# Altium PCB BSR049A.PcbDoc (part 2 of 3)
Units mil, origin at the board's own origin, x right, y up, seen from the top; angles counter-clockwise.
Board outline 3160 x 2500 mil, 4 copper layers (Top Layer1, Layer2, Layer3, Bottom Layer4), stack 61.2 mil thick; 91 components, 27 nets, 205 pads, 285 vias.
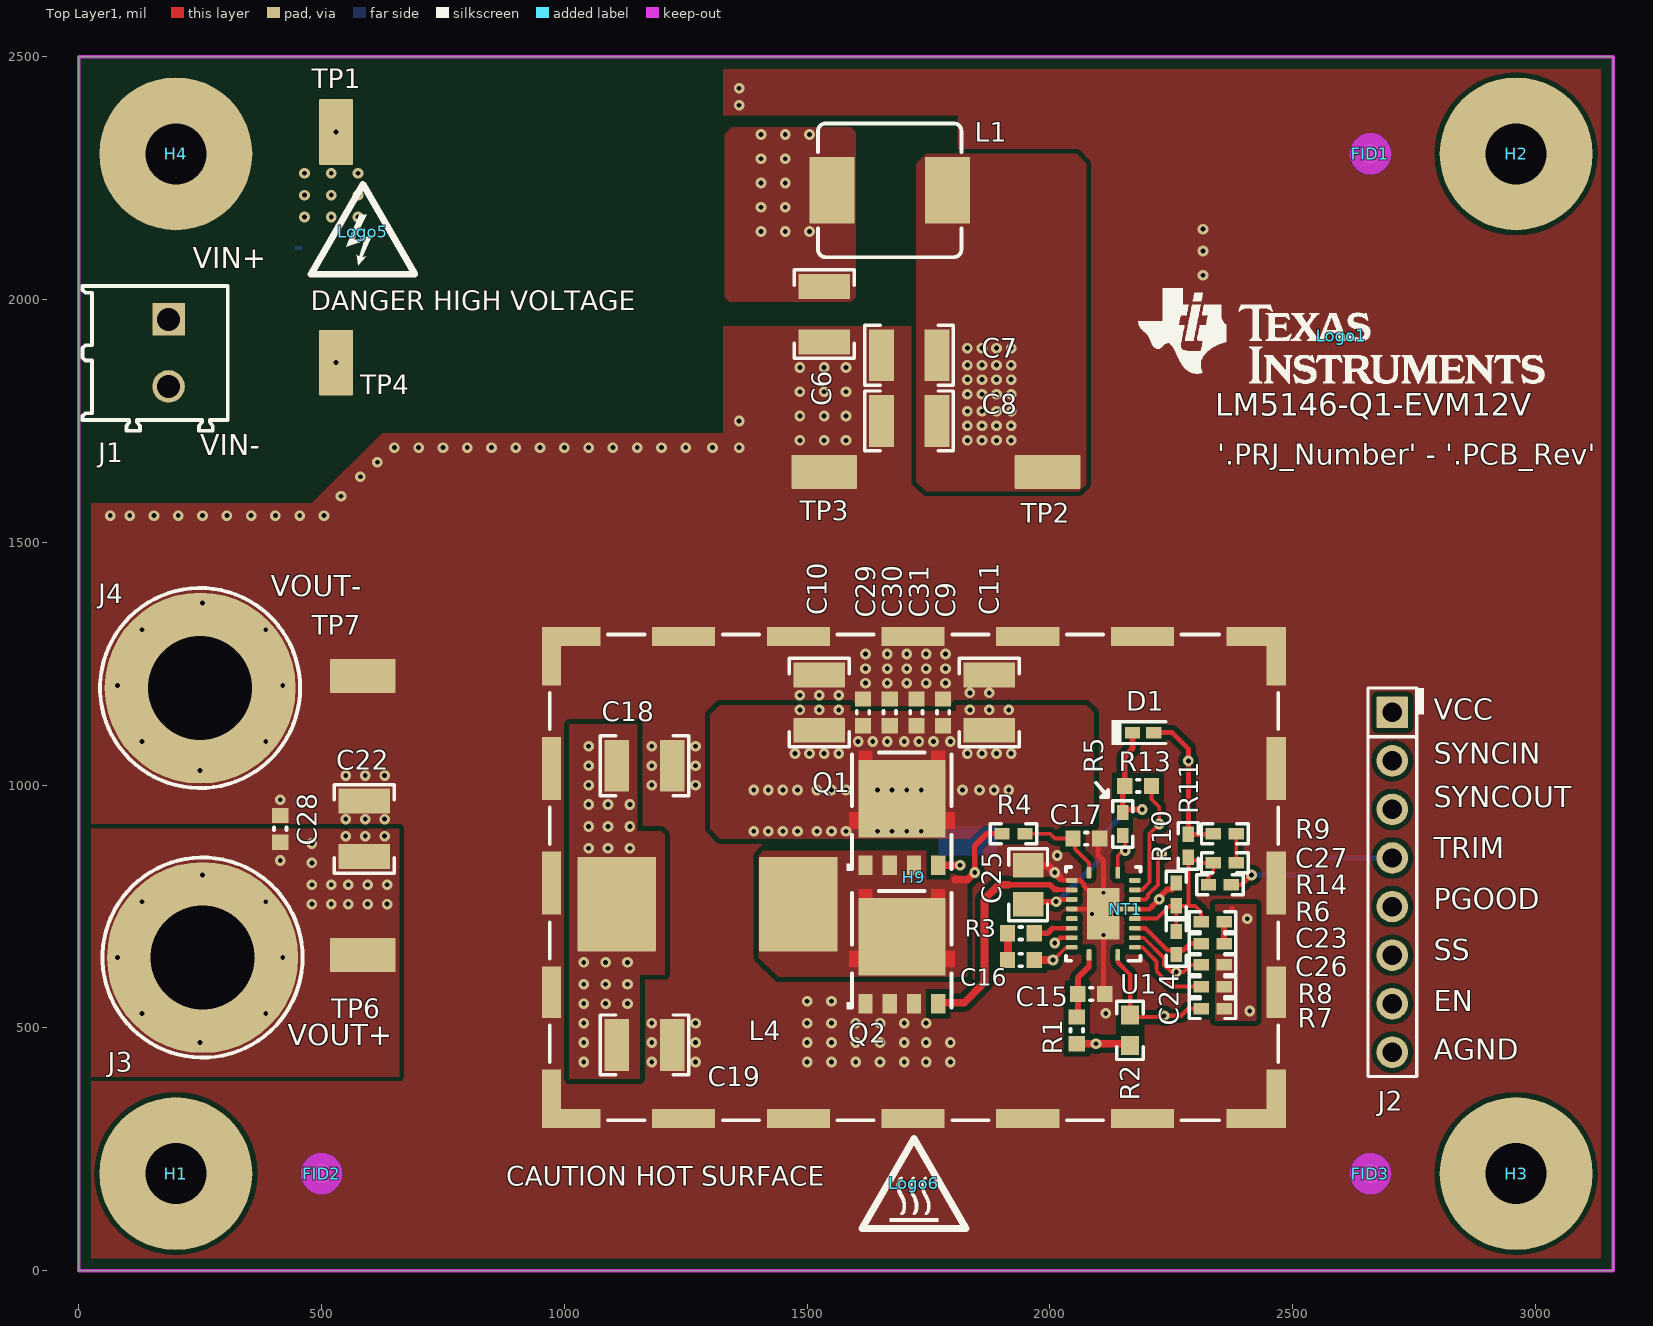
[diagram p0: Top Layer1 view]

## Part data (continued)
R10: library part CMP-0026088-3, "RES, 1.50 k, 1%, 0.063 W, AEC-Q200 Grade 0, 0402", Manufacturer=Vishay-Dale, Power_W=63mW, Supplier Part Number 1=541-1.50KLCT-ND, TempCo="100 ppm/C", Tolerance_%=1%, Value2=0.063W, Value_Code=1k50, ValueDisplayed=1.50k, AEC Category=Q200, AEC Grade=0, AEC Qualified=Y, ComponentLink1Description="Datasheet link", ComponentLink1URL=http://www.vishay.com/docs/20035/dcrcwe3.pdf, CompType=Resistor, EIA_Code=E96, MountType=SMT, PackageReference=0402, PartNumber=CRCW04021K50FKED, Res_ohm=1.5k, RoHS=E, SizeArea_mm2=0.5, SizeX_mm=1, SizeY_mm=0.5, SizeZ_mm=0.6, Supplier 1=Digi-Key, Supplier 2=Newark, Supplier 3=Mouser, Supplier Part Number 2=52K6575, Supplier Part Number 3=71-CRCW0402-1.5K-E3, Technology="Thick Film", Value1=1%, VDC_V=50V
R11: library part CMP-0026170-2, "RES, 21.0 k, 1%, 0.063 W, AEC-Q200 Grade 0, 0402", Manufacturer=Vishay-Dale, Power_W=63mW, Supplier Part Number 1=541-21.0KLCT-ND, TempCo="100 ppm/C", Tolerance_%=1%, Value2=0.063W, Value_Code=21k0, ValueDisplayed=21.0k, AEC Category=Q200, AEC Grade=0, AEC Qualified=Y, ComponentLink1Description="Datasheet link", ComponentLink1URL=http://www.vishay.com/docs/20035/dcrcwe3.pdf, CompType=Resistor, EIA_Code=E96, MountType=SMT, PackageReference=0402, PartNumber=CRCW040221K0FKED, Res_ohm=21k, RoHS=E, SizeArea_mm2=0.5, SizeX_mm=1, SizeY_mm=0.5, SizeZ_mm=0.6, Supplier 1=Digi-Key, Supplier 2=Newark, Supplier 3=Mouser, Supplier Part Number 2=52K6830, Supplier Part Number 3=71-CRCW0402-21K-E3, Technology="Thick Film", Value1=1%, VDC_V=50V
R13: library part CMP-0022204-4, "RES, 20.0 k, 1%, 0.1 W, AEC-Q200 Grade 0, 0603", Manufacturer=Vishay-Dale, Power_W=100mW, Supplier Part Number 1=541-20.0KHCT-ND, TempCo="100 ppm/C", Tolerance_%=1%, Value2=0.1W, Value_Code=20k0, ValueDisplayed=20.0k, AEC Category=Q200, AEC Grade=0, AEC Qualified=Y, ComponentLink1Description="Datasheet link", ComponentLink1URL=http://www.vishay.com/docs/20035/dcrcwe3.pdf, CompType=Resistor, EIA_Code=E96, MountType=SMT, PackageReference=0603, PartNumber=CRCW060320K0FKEA, Res_ohm=20k, RoHS=E, SizeArea_mm2=1.28, SizeX_mm=1.6, SizeY_mm=0.8, SizeZ_mm=1, Supplier 1=Digi-Key, Supplier 2=Newark, Supplier 3=Mouser, Supplier Part Number 2=52K8267, Supplier Part Number 3=71-CRCW0603-20K-E3, Technology="Thick Film", Value1=1%, VDC_V=75V
R14: library part CMP-0026315-2, "RES, 36.5 k, 1%, 0.063 W, AEC-Q200 Grade 0, 0402", Manufacturer=Vishay-Dale, Power_W=63mW, Supplier Part Number 1=541-36.5KLCT-ND, TempCo="100 ppm/C", Tolerance_%=1%, Value2=0.063W, Value_Code=36k5, ValueDisplayed=36.5k, AEC Category=Q200, AEC Grade=0, AEC Qualified=Y, ComponentLink1Description="Datasheet link", ComponentLink1URL=http://www.vishay.com/docs/20035/dcrcwe3.pdf, CompType=Resistor, EIA_Code=E96, MountType=SMT, PackageReference=0402, PartNumber=CRCW040236K5FKED, Res_ohm=36.5k, RoHS=E, SizeArea_mm2=0.5, SizeX_mm=1, SizeY_mm=0.5, SizeZ_mm=0.6, Supplier 1=Digi-Key, Supplier 2=Newark, Supplier 3=Mouser, Supplier Part Number 2=52K7007, Supplier Part Number 3=71-CRCW0402-36.5K-E3, Technology="Thick Film", Value1=1%, VDC_V=50V
TP1: library part CMP-0078225-1, "PC Test Point, SMT", Manufacturer=Keystone, Supplier Part Number 1=36-5017CT-ND, ComponentLink1Description="Datasheet Link", ComponentLink1URL=http://www.keyelco.com/product-pdf.cfm?p=1355, CompType="Test Point", Key=5017, MountType=SMT, PackageReference="PC Test Point, SMT", PartNumber=5017, RoHS=Y, Supplier 1=Digi-Key, Supplier 2=Newark, Supplier 3=Mouser, Supplier Part Number 2=05AC2856, Supplier Part Number 3=534-5017
TP2 TP3 TP4 TP6 TP7: library part CMP-0078225-1, "PC Test Point, SMT", Manufacturer=Keystone, PartNumber=5017, Supplier Part Number 1=36-5017CT-ND, ComponentLink1Description="Datasheet Link", ComponentLink1URL=http://www.keyelco.com/product-pdf.cfm?p=1355, CompType="Test Point", Key=5017, MountType=SMT, PackageReference="PC Test Point, SMT", RoHS=Y, Supplier 1=Digi-Key, Supplier 2=Newark, Supplier 3=Mouser, Supplier Part Number 2=05AC2856, Supplier Part Number 3=534-5017
U1: library part CMP-0081848-1, "5.5-V to 100-V Synchronous Buck Controller With Wide Duty Cycle Range, RGY0020B (VQFN-20)", Alternate Manufacturer="Texas Instruments", Alternate PartNumber=LM5146QRGYTQ1, AEC Category=Q200, AEC Qualified=Y, ComponentLink1Description="Datasheet Link", ComponentLink1URL=http://www.ti.com/lit/ds/symlink/lm5146-q1.pdf, ComponentLink2Description="Product Folder", ComponentLink2URL=http://www.ti.com/product/lm5146-q1, ComponentLink3Description="Online Datasheet", ComponentLink3URL=http://www.ti.com/product/lm5146-q1/datasheet, CompType=IC, Manufacturer="Texas Instruments", MountType=SMT, PackageDescription=VQFN-20, PackageReference=RGY0020B, PartNumber=LM5146QRGYRQ1, SizeArea_mm2=15.75, SizeAreaWB_mm2=24.75, SizeX_mm=3.5, SizeY_mm=4.5, SizeZ_mm=1
ZZ2: library part CMP-0077236-1, ClassName=AssemblyNote, CompType=AssemblyNote, Key=AssemblyNote, LatestRevisionDate=2017-08-10, Publisher="Texas Instruments"
ZZ3: library part CMP-0077237-1, ClassName=AssemblyNote, CompType=AssemblyNote, Key=AssemblyNote, LatestRevisionDate=2017-08-10, Publisher="Texas Instruments"
ZZ4: library part CMP-0077238-1, ClassName=AssemblyNote, CompType=AssemblyNote, Key=AssemblyNote, LatestRevisionDate=2017-08-10, Publisher="Texas Instruments"

## Via types
v1: diameter 22, hole 10, Top Layer1 to Bottom Layer4, tented both sides, 263 vias
v2: diameter 22, hole 10, Top Layer1 to Bottom Layer4, 18 vias
v3: diameter 19.68, hole 7.87, Top Layer1 to Bottom Layer4, 4 vias